# Altium PCB SimpleNode32.pcbDoc
Units mil, origin at the board's own origin, x right, y up, seen from the top; angles counter-clockwise.
Board outline 1299.21 x 551.18 mil, 2 copper layers (Top Layer, Bottom Layer); 45 components, 43 nets, 165 pads, 38 vias.
Unrouted connection lines stored in the file: 5.
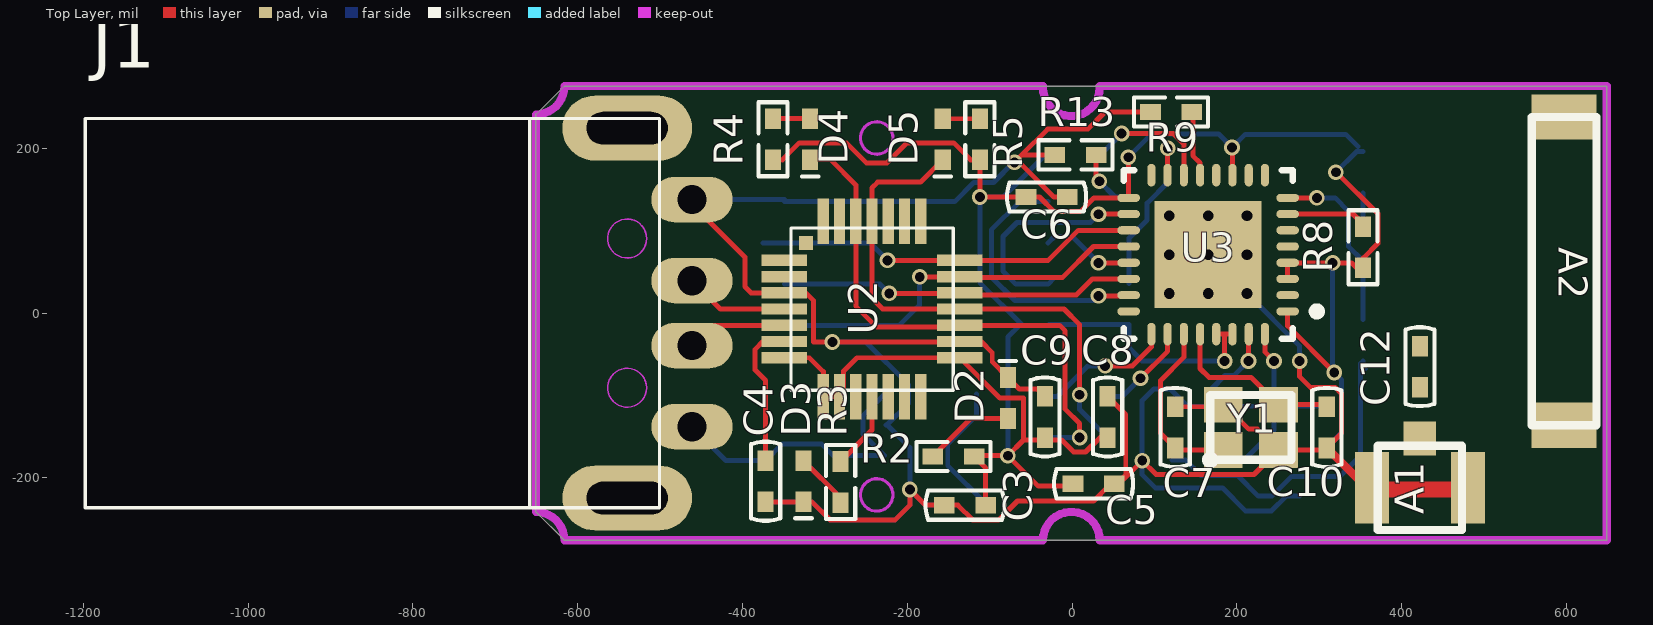
[diagram p0: Top Layer view]
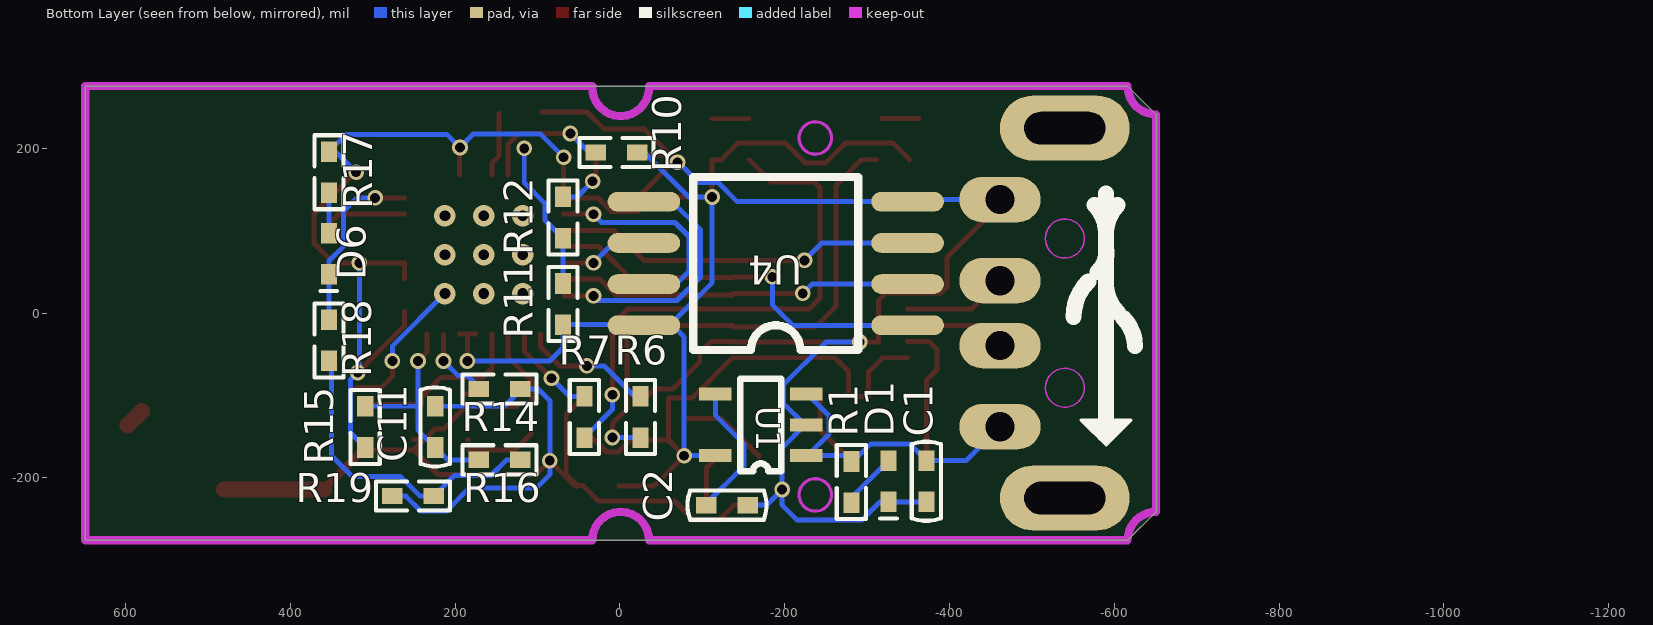
[diagram p1: Bottom Layer view, seen from below]

## Layer stack, top to bottom
Top Layer: signal copper 1.4
Dielectric: dielectric 12.6, FR-4, Dk 4.8
Bottom Layer: signal copper 1.4

## Board outline
648.61,275.59 648.61,-275.59 33.45,-275.59 -616,-275.59 -650.45,-241.14 -650.61,-241.14 -650.61,241.14 -616.16,275.59 -35.45,275.59 33.45,275.59 648.61,275.59

## Design rules (kind name [scope] priority, off if disabled: settings)
Clearance [All] p1: gap=5
DiffPairsRouting [All] p1: maxlimit=10 minlimit=10 mostfreqgap=10 maxuncoupledlength=500
MinimumSolderMaskSliver [All] p1 off: minsoldermaskwidth=10
PolygonConnect [All] p1: connectstyle=Relief reliefconductorwidth=10 reliefentries=4 polygonreliefangle="90 Angle"
RoutingVias [All] p1: holewidth=12 width=19 viastyle="Through Hole" minholewidth=12 minwidth=19 maxholewidth=12 maxwidth=19
SilkToSilkClearance [All] p1 off: silktosilkclearance=10
SilkscreenOverComponentPads [All] p1 off: minsilkscreentomaskgap=10
SolderMaskExpansion [All] p1: expansion=4
Width [All] p1: maxlimit=20 minlimit=6 preferedwidth=6
24 further rules are at their usual default settings.

## Classes and differential pairs
differential pair UD: +UD_P -UD_N

## Components (designator, comment, footprint, x,y, rotation, side; value= is the part's Value field where it differs from the comment)
A1 "50ohm" "IPEX-1 底座" 422,-212 r90 top
A2 "2.4GHz" AN9520-245 597,51 r180 top
C1 "105" C0402 -372,-204 r90 bottom
C2 "CAP" C0402 -130,-233 r0 bottom
C3 "CAP" C0402 -130,-233 r0 top
C4 "CAP" C0402 -372,-204 r90 top
C5 "CAP" C0402 26,-207 r0 top
C6 "10V" C0402 -31,141 r180 top
C7 "10V" C0402 125,-138.6 r90 top
C8 "10V" C0402 43,-126 r270 top
C9 "10V" C0402 -33,-126 r270 top
C10 "10V" C0402 309,-138.6 r270 top
C11 "10V" C0402 224,-138 r270 bottom
C12 "10V" C0402 422,-65 r90 top
D1 "PW5V" LED0402 -326,-204 r270 bottom
D2 "LED" LED0402 -78,-103 r90 top
D3 "STA" LED0402 -326,-203.95 r270 top
D4 "TXD" LED0402 -318,211 r270 top
D5 "LED" LED0402 -157,211 r270 top
D6 "RST" LED0402 353,72 r270 bottom
J1 "USB-A" "USB-A 公头" -540,0 r0 top
R1 "5%" R0402 -281,-205 r90 bottom
R2 "5%" R0402 -144,-174 r180 top
R3 "5%" R0402 -281,-205 r90 top
R4 "5%" R0402 -363,211 r90 top
R5 "5%" R0402 -112,211 r270 top
R6 "5%" R0402 -25,-126 r90 bottom
R7 "5%" R0402 43,-126 r90 bottom
R8 "1%" R0402 353,80 r90 top
R9 "1%" R0402 120,244 r0 top
R10 "1%" R0402 4,195 r0 bottom
R11 "1%" R0402 69,11 r90 bottom
R12 "5%" R0402 69,116 r90 bottom
R13 "FLASH" R0402 4,192 r0 top
R14 "1%" R0402 146,-92 r180 bottom
R15 "1%" R0402 309,-138 r270 bottom
R16 "NC" R0402 146,-178 r0 bottom
R17 "5%" R0402 353,171 r270 bottom
R18 "5%" R0402 353,-33 r270 bottom
R19 "RESET" R0402 251,-222 r180 bottom
U1 "SPX3819M5-L-3-3" SOT25-5 -171.12,-133 r0 bottom
U2 "CP2102" MLP28 -245,-1 r0 top
U3 "ESP8266" QFN32L 165,71 r180 top
U4 "2M Flash" SOIC8 -349.17,-14.74 r0 bottom
Y1 "10ppm" XTAL-2520 216.8,-138.6 r0 top

## Footprints (in the part's own frame and the unit in brackets; to place one, negate y for a bottom-side part, rotate by r counter-clockwise, add the part's x,y. Pads: shape width x height; smd on the part's side, far side on the other; paste and mask are expansions set on the pad)
AN9520-245 [mm] "R"
  rect 2x1.4 smd: 0(0,-4.75) 1(0,4.75)
  silkscreen extent -1,-4.75 1,4.75
C0402 [mm]
  rect 0.635x0.5 smd: 1(-0.635,0) 2(0.635,0)
  silkscreen extent -1.22,-0.45 1.22,0.45
"IPEX-1 底座" [mm]
  rect 1.05x1 smd: 1(1.525,0)
  rect 2.2x1.05 smd: 2(0,1.475) 3(0,-1.475)
  silkscreen extent -1.3,-1.3 1.3,1.3
LED0402 [mm]
  rect 0.635x0.5 smd: 1(-0.632,0) 2(0.633,0)
  silkscreen extent 1.14,-0.25 1.14,0.25
MLP28 [mm]
  rect 1.4x0.35 smd: 1(-2.646,1.651) 2(-2.646,1.151) 3(-2.646,0.651) 4(-2.646,0.151) 5(-2.646,-0.349) 6(-2.646,-0.849) 7(-2.646,-1.349) 15(2.754,-1.349) 16(2.754,-0.849) 17(2.754,-0.349) 18(2.754,0.151) 19(2.754,0.651) 20(2.754,1.151) 21(2.754,1.651)
  rect 0.35x1.4 smd: 8(-1.446,-2.549) 9(-0.946,-2.549) 10(-0.446,-2.549) 11(0.054,-2.549) 12(0.554,-2.549) 13(1.054,-2.549) 14(1.554,-2.549) 22(1.554,2.851) 23(1.054,2.851) 24(0.554,2.851) 25(0.054,2.851) 26(-0.446,2.851) 27(-0.946,2.851) 28(-1.446,2.851)
  rect 0.435x0.435 smd: ""(-1.978,2.183)
  silkscreen extent -2.45,-2.35 2.55,2.65
QFN32L [mm]
  oval 0.7x0.25 smd: 1(-2.45,1.75) 2(-2.45,1.25) 3(-2.45,0.75) 4(-2.45,0.25) 5(-2.45,-0.25) 6(-2.45,-0.75) 7(-2.45,-1.25) 8(-2.45,-1.75) 17(2.45,-1.75) 18(2.45,-1.25) 19(2.45,-0.75) 20(2.45,-0.25) 21(2.45,0.25) 22(2.45,0.75) 23(2.45,1.25) 24(2.45,1.75)
  oval 0.25x0.7 smd: 9(-1.75,-2.45) 10(-1.25,-2.45) 11(-0.75,-2.45) 12(-0.25,-2.45) 13(0.25,-2.45) 14(0.75,-2.45) 15(1.25,-2.45) 16(1.75,-2.45) 25(1.75,2.45) 26(1.25,2.45) 27(0.75,2.45) 28(0.25,2.45) 29(-0.25,2.45) 30(-0.75,2.45) 31(-1.25,2.45) 32(-1.75,2.45)
  rect 3.3x3.3 smd: 33(0,0)
  silkscreen extent -3.48,-2.6 2.6,2.6, body extent -2.58,-2.58 2.58,2.58, height 0.8
R0402 [mm]
  rect 0.635x0.5 smd: 1(-0.635,0) 2(0.635,0)
  silkscreen extent -1.14,-0.45 1.14,0.45
SOIC8 [mil]
  oval 88x24 smd: 1(0,0) 2(0,-50) 3(0,-100) 4(0,-150) 5(320,-150) 6(320,-100) 7(320,-50) 8(320,0)
  silkscreen extent 60,-180 260,30, body extent -5,-181 325,31, height 91
SOT25-5 [mm]
  rect 1x0.4 smd: 1(-1.397,1.016) 2(-1.397,0.066) 3(-1.397,-0.884) 4(1.403,-0.884) 5(1.403,1.016)
  silkscreen extent -0.64,-1.36 0.64,1.49
"USB-A 公头" [mm]
  oval 1.5x1.4 on Bottom Overlay: 1(-1.27,3.683)
  oval 2.5x1.4 hole 0.9: 1(2,-3.5) 2(2,-1) 3(2,1) 4(2,3.5)
  oval 4x2 hole 1 slot 2.5 at 0 deg: 4(0,-5.7) 4(0,5.7)
  Keep-Out Layer circle w0.05: c0,-2.3 r0.6
  Keep-Out Layer circle w0.05: c0,2.3 r0.6
  silkscreen extent -16.7,-6 1,6
XTAL-2520 [mm]
  rect 1.2x1.1 smd: 1(-0.85,-0.7) 2(0.85,-0.7) 3(0.85,0.7) 4(-0.85,0.7)
  silkscreen extent -1.38,-1.13 1.25,1

## Part data
A1: library part "IPEX-1 底座", "IPEX-1 底座"
A2: library part AN9520-245, "2.4G陶瓷天线"
U4: library part GD25Q16CSIG

## Via types
v1: diameter 19, hole 12, Top Layer to Bottom Layer, 29 vias
v2: diameter 25.98, hole 12.99, Top Layer to Bottom Layer, tented top, 9 vias

## Nets (pads, with @x,y where several pads share a name; then routed paths per layer and width w, separated by ;. In a path a pad name is that pad's centre, name@x,y a point inside that pad or via, vN(x,y) a via of type N, cw(c..) or ccw(c..) an arc to the next point about the centre after c; other vN are vias at no path point)
ADC: U3.6
GND: A1.2 A1.3 C1.1 C2.1 C3.1 C4.1 C5.2 C6.1 C7.2 C8.1 C9.1 C10.2 C11.1 D1.2 D2.2 D3.2 J1.4 R9.1 R13.1 R14.2 R19.1 U1.2 U2.3 U2.16 U3.33 U4.4 Y1.2 Y1.4 | length 3834.2
  Top Layer w6: J1.4@-461.26,117.72 -461.26,137.8 -461.26,132.14 -397,67.88 -397,32 -389.63,24.63 U2.3 -323.09,24.63 -313.61,15.15 -313.61,-35 v1(-291,-35) U2.16@-137.14,-35 ; C4.1 D3.2@-326.15,-229 ; D3.2 -315.8,-228.85 -293.89,-250.77 -214.77,-250.77 -197,-233 v1(-197,-214) -178,-233 C3.1 -138.66,-233 -120.81,-250.84 -89.19,-250.84 -66.34,-228 26,-228 45,-209 51.01,-209.04 C5.2@51.96,-209.04 ; U2.16 -110.49,-34.43 -97,-47.92 -97,-59.1 D2.2 -64.1,-92 -42,-92 C9.1 ; R13.1 -61,192 ; C6.1 -22.34,141 -64.34,183 v1(-70,183) -61,192 ; C8.1 65,-123 65,-196 C5.2@51.96,-209.04 ; R9.1 39.83,244 19.04,223.21 -29.79,223.21 -61,192 ; C7.2 Y1.4@180.77,-113.6 ; Y1.4 184.8,-111.04 214.46,-140.69 224.8,-140.69 Y1.2 ; Y1.4@183.33,-98.04 Y1.4@188.98,-98.04 ; Y1.2@239.92,-153.16 Y1.2@250.26,-153.16 ; v1(276,-58) 276,-77 289,-90 319.06,-90 326.84,-97.78 326.84,-145.76 C10.2 ; C10.2@306.44,-166.16 Y1.2 ; C5.2@51.96,-209.04 C5.2@54.94,-209.06 ; C5.2@51.96,-209.04 51,-210 54,-210 C5.2@54.94,-209.06 ; C5.2@54.94,-209.06 v1(85,-179) 101.81,-195.81 220.61,-195.81 Y1.2
  Top Layer w10: C10.2 A1.2@359.4,-214
  Top Layer w20: A1.2@359.4,-214 363.93,-214 A1.3@480.07,-214
  Bottom Layer w6: J1.4@-461.06,138 U4.4@-349,138 ; C1.1 D1.2@-326.1,-229 ; U4.4 -142.49,135.26 -119.25,158.5 -95.5,158.5 v1@-70.5,183.5 ; D1.2 -315.75,-228.9 -293.89,-250.77 -214.77,-250.77 -197,-233 v1(-197,-214) ; v1(-291,-35) -250.44,-35 -198.43,-87.01 -198.43,-109.38 U1.2@-224.65,-135.6 ; U1.2 U1.2@-224.65,-135.6 ; C2.1 -178,-233 v1(-197,-214) ; v2(212.24,23.76) 276,-40 v1(276,-58) ; C11.1 140,-113 119,-92 99,-92 85,-106 v1(85,-179) 85,-196 101,-212 182.34,-212 210.19,-239.84 241.81,-239.84 259.66,-222 R19.1 ; U1.2@-224.65,-135.6 -197,-163.25 v1(-197,-214)
  other v2: 117.76,23.76 165,23.76 117.76,71 165,71 212.24,71 117.76,118.24 165,118.24 212.24,118.24
GPIO0: R11.2 R12.1 U3.15 | length 215.8
  Top Layer w6: U3.15 v1@115.79,199.79
  Bottom Layer w6: R11.2 R12.1 91,113 91,133.47 116,158.47 v1(116,200)
GPIO2: R10.2 U3.14 | length 151.1
  Top Layer w6: v1(60,218) 122.75,218 135.47,205.28 U3.14
  Bottom Layer w6: R10.2@37,195 v1(60,218)
GPIO4: U3.16
GPIO5: U3.24
GPIO12: U3.10
GPIO13: U3.12
GPIO14: U3.9
GPIO15: R9.2 U3.13 | length 78.7
  Top Layer w6: R9.2@146.47,242.53 146.47,191 155.16,182.31 U3.13
GPIO16: D6.2 R18.1 U3.8 | length 219.6
  Top Layer w6: U3.8 v1(296.9,139.9)
  Bottom Layer w6: v1(296.9,139.9) 319.1,139.9 335.16,123.84 335.16,81.09 353,63.25 D6.2 R18.1
NetA1_1: A1.1 A2.1 C12.1 | length 24.1
  Top Layer w20: A2.1@579.99,-119 A2.1
NetC2_2: C2.2 U1.4 | length 166.4
  Bottom Layer w6: U1.4 -115.88,-123.88 -151,-159 -151,-185 C2.2@-105,-231
NetC4_2: C4.2 U2.6 | length 179.9
  Top Layer w6: C4.2 -372,-81.73 -384.73,-69 -384.73,-43.91 -375.25,-34.43 U2.6
NetC7_1: C7.1 U3.27 Y1.1 | length 214.5
  Top Layer w6: C7.1 107.16,-145.76 107.16,-81.84 135.47,-53.53 U3.27 ; C7.1@127.56,-166.16 Y1.1 ; Y1.1@183.33,-153.16 Y1.1@184.8,-153.16
NetC10_1: C10.1 U3.28 Y1.3 | length 207.1
  Top Layer w6: U3.28 155.16,-67.16 166,-78 217,-78 240.74,-101.74 Y1.3@240.74,-111.04 ; Y1.3 C10.1@306.44,-111.04
NetC11_2: C11.2 R15.1 R16.2 U3.32 | length 271.1
  Top Layer w6: U3.32 233.9,-46.9 v1(245,-58)
  Bottom Layer w6: R16.2 209,-178 C11.2 245,-142 v1(245,-58) ; 248,-113 R15.1
NetC12_2: C12.2 U3.2
NetD1_1: D1.1 R1.1 | length 62.2
  Bottom Layer w6: D1.1@-325,-180 R1.1@-281,-224
NetD2_1: D2.1 R2.2 | length 110.1
  Top Layer w6: R2.2 -122.9,-127.9 D2.1
NetD3_1: D3.1 R3.1 | length 63.6
  Top Layer w6: D3.1 R3.1@-281,-224.05
NetD4_1: D4.1 R4.2 | length 44.9
  Top Layer w6: R4.2 D4.1@-318.1,236
NetD5_1: D5.1 R5.1 | length 44.9
  Top Layer w6: D5.1 R5.1@-112.1,235.9
NetD6_1: D6.1 R17.2 | length 49.1
  Bottom Layer w6: D6.1 R17.2
NetR3_2: R3.2 U2.11 | length 94.4
  Top Layer w6: R3.2 -242.87,-141.87 U2.11
NetR8_2: R8.2 U3.7 | length 107.6
  Top Layer w6: U3.7 340.79,120.21 353,108 R8.2@353,97
NetR12_2: R12.2 R13.2 | length 77.5
  Top Layer w6: R13.2 29,164 v1(33,160)
  Bottom Layer w6: v1(33,160) 52,141 R12.2
NetR14_1: R14.1 U3.31 | length 91.4
  Top Layer w6: v1(214,-58) U3.31@214,-25.67
  Bottom Layer w6: R14.1@169,-92 185.5,-75.5 196.5,-75.5 v1(214,-58)
NetR16_1: R16.1 R18.2 R19.2 | length 389.9
  Bottom Layer w6: R16.1 137.34,-178 156.34,-197 201,-197 R19.2 242.34,-222 266.34,-198 325,-198 349.84,-173.16 R18.2@349.84,-61.16 ; R18.2 353,-64.32 R18.2@356,-67.32
RXD: D5.2 R7.1 U2.18 U2.25 | length 650.4
  Top Layer w6: D5.2 -184.1,159 -236,159 -242.87,152.13 U2.25 -242.87,17.87 -229.95,4.95 U2.18 -9.95,4.95 9,-14 v1(9,-99)
  Bottom Layer w6: v1(9,-99) 9,-117 R7.1
SD_CLK: U3.21 U4.6 | length 114
  Top Layer w6: v1(32,61) U3.21@68.39,61
  Bottom Layer w6: U4.6 -21.43,93 0,93 v1(32,61)
SD_CMD: U2.20 U3.20 U4.1 | length 477.3
  Top Layer w6: v1(-185,44) U2.20@-136.88,44 ; U2.20@-136.57,43 -12,43 25.84,80.84 U3.20
  Bottom Layer w6: U4.1 -209.74,-14.74 -185,10 v1(-185,44)
SD_DATA_0: U2.19 U3.22 U4.2 | length 429.8
  Top Layer w6: v1(-222,24) U2.19@-137.2,24 ; U2.19@-136.57,22 5,22 24.47,41.47 U3.22
  Bottom Layer w6: U4.2 -233.26,35.26 v1(-222,24)
SD_DATA_1: U3.23 U4.5 | length 319.2
  Top Layer w6: v1@33,21 U3.23@67.76,21
  Bottom Layer w6: U4.5 -63.74,135.26 -98,101 -98,43.81 -69.45,15.26 26.26,15.26 v1(32,21)
SD_DATA_2: U3.18 U4.7 | length 277.5
  Top Layer w6: v1@33.21,120.21 U3.18
  Bottom Layer w6: U4.7@-20.93,43.5 U4.7 -68.26,35.26 -84,51 -84,93 -67,110 22,110 v1(32,120)
SD_DATA_3: U2.21 U3.19 U4.3 | length 467.7
  Top Layer w6: v1(-224,64) U2.21 -29,64 7.53,100.53 U3.19
  Bottom Layer w6: U4.3@-375.26,85.26 U4.3 -245.26,85.26 v1(-224,64)
TXD: D4.2 R6.1 U2.17 U2.26 | length 646.6
  Top Layer w6: D4.2@-311.33,186.1 -293.1,186.1 -262.55,155.55 U2.26 -262.55,8.55 -237,-17 U2.17@-136.57,-17 ; U2.17 -15.26,-14.74 -8.5,-21.5 -8.5,-116.5 9,-134 v1(9,-151)
  Bottom Layer w6: R6.1 v1(9,-151)
U0RXD: R6.2 U3.25 | length 161.6
  Top Layer w6: v1(40,-64) 73.25,-64 96.1,-41.15 U3.25
  Bottom Layer w6: R6.2 -17.75,-101 19.25,-64 v1(40,-64)
U0TXD: R7.2 U3.26 | length 116.2
  Top Layer w6: v1(83,-79) 115.79,-46.21 U3.26
  Bottom Layer w6: R7.2 61,-101 v1(83,-79)
UD_N: J1.2 U2.5 | length 122.3
  Top Layer w6: J1.2 -436.63,-14.74 U2.5
UD_P: J1.3 U2.4 | length 126.4
  Top Layer w6: J1.3 -426.83,4.95 U2.4
VCC3V3: C3.2 C5.1 C6.2 C8.2 C9.2 R2.1 R4.1 R5.2 R8.1 R10.1 R11.1 R15.2 R17.1 U1.5 U2.7 U2.8 U2.9 U2.15 U3.1 U3.3 U3.4 U3.11 U3.17 U3.29 U3.30 U4.8 | length 3118.3
  Top Layer w6: -351.75,186 -331.16,206.6 -274.04,206.6 -249.74,182.3 -224.7,182.3 -200.4,206.6 -143.84,206.6 -123.25,186 R5.2 -112,142 v1@-111,141 ; U2.7 -318.89,-54.11 -301.92,-71.08 U2.8 U2.9 -277.44,-96.56 -277.44,-70.48 -261.07,-54.11 U2.15 -87.68,-103 -59,-103 -59,-154 ; R2.1 -105,-188 C3.2 ; R2.1@-118,-173 v1(-78,-173) ; v1(-112,141) v1@-111,141 ; v1@-109.9,139.9 v1@-111,141 ; C5.1@1,-210 -41,-210 v1(-78,-173) ; C8.2@33.75,-151 16.25,-168.5 1.75,-168.5 -12.75,-154 -59,-154 ; v1@68.54,188.88 U3.17 26.55,139.9 9.81,123.16 -21.81,123.16 -39.66,141 C6.2 v1@-111,141 ; U3.29 185,-25.46 ; v1(185,-58) 185,-25.46 ; U3.30 185,-25.46 ; U3.11 v1@194.53,200.47 ; U3.1 261.46,-15.46 v1(318,-72) ; U3.3 U3.4@261.46,61 ; U3.4 U3.4@261.46,61 ; v1(320,171) 320.66,171 370.84,120.81 370.84,84.5 R8.1@353,66.66 ; R8.1@353,47 339,61 v1(316,61) U3.4@261.46,61 ; v1(-78,-173) -59,-154
  Bottom Layer w6: U1.5 v1(-78,-173) -78,-29 -63.74,-14.74 U4.8@-60.26,-14.74 ; v1@-112,139.9 -112,37 U4.8@-60.26,-14.74 ; v1(-112,141) -83.71,141 R10.1@-29.71,195 ; U4.8 U4.8@-60.26,-14.74 ; U4.8@-28.43,-14 R11.1 69,-42 85,-58 v1(185,-58) ; v1(68.21,189.21) 96.5,217.5 177.5,217.5 v1(194,201) 210,217 332,217 R17.1@347,202 ; R15.2 326.84,-145.16 326.84,-80.84 v1(318,-72) ; v1@316,-70 v1(316,61) ; v1(320,171) 345,196 R17.1
VCC5V: C1.2 J1.1@-461.26,-137.8 R1.2 U1.1 U1.3 | length 363.1
  Bottom Layer w6: J1.1@-461.26,-137.8 -420.06,-179 C1.2 -351.6,-158.6 -304.4,-158.6 -290,-173 -227.59,-173 -253.8,-146.79 -253.8,-124.41 -227.59,-98.2 U1.3
pads on no net: A2.0 J1.1@-590,145 U2. U2.1 U2.2 U2.10 U2.12 U2.13 U2.14 U2.22 U2.23 U2.24 U2.27 U2.28 U3.5

## Keep-outs
Keep-Out Layer:
  circle w3.94: c-237.22,-220.54 r19.68
  circle w3.94: c-237.22,212.54 r19.68
  lines w10: -616.16,-275.59 ccw(c-650.61,-275.59) -650.61,-241.14 -650.61,241.14 ccw(c-650.61,275.59) -616.16,275.59 -35.45,275.59 ; -616,-275.59 -35.45,-275.59 cw(c-1,-275.59) 33.45,-275.59 648.61,-275.59 648.61,275.59 33.45,275.59 ; -35.45,273.59 ccw(c-1,273.59) 33.45,273.59